# EAGLE board lm709_PCB (EAGLE 9.6.2)
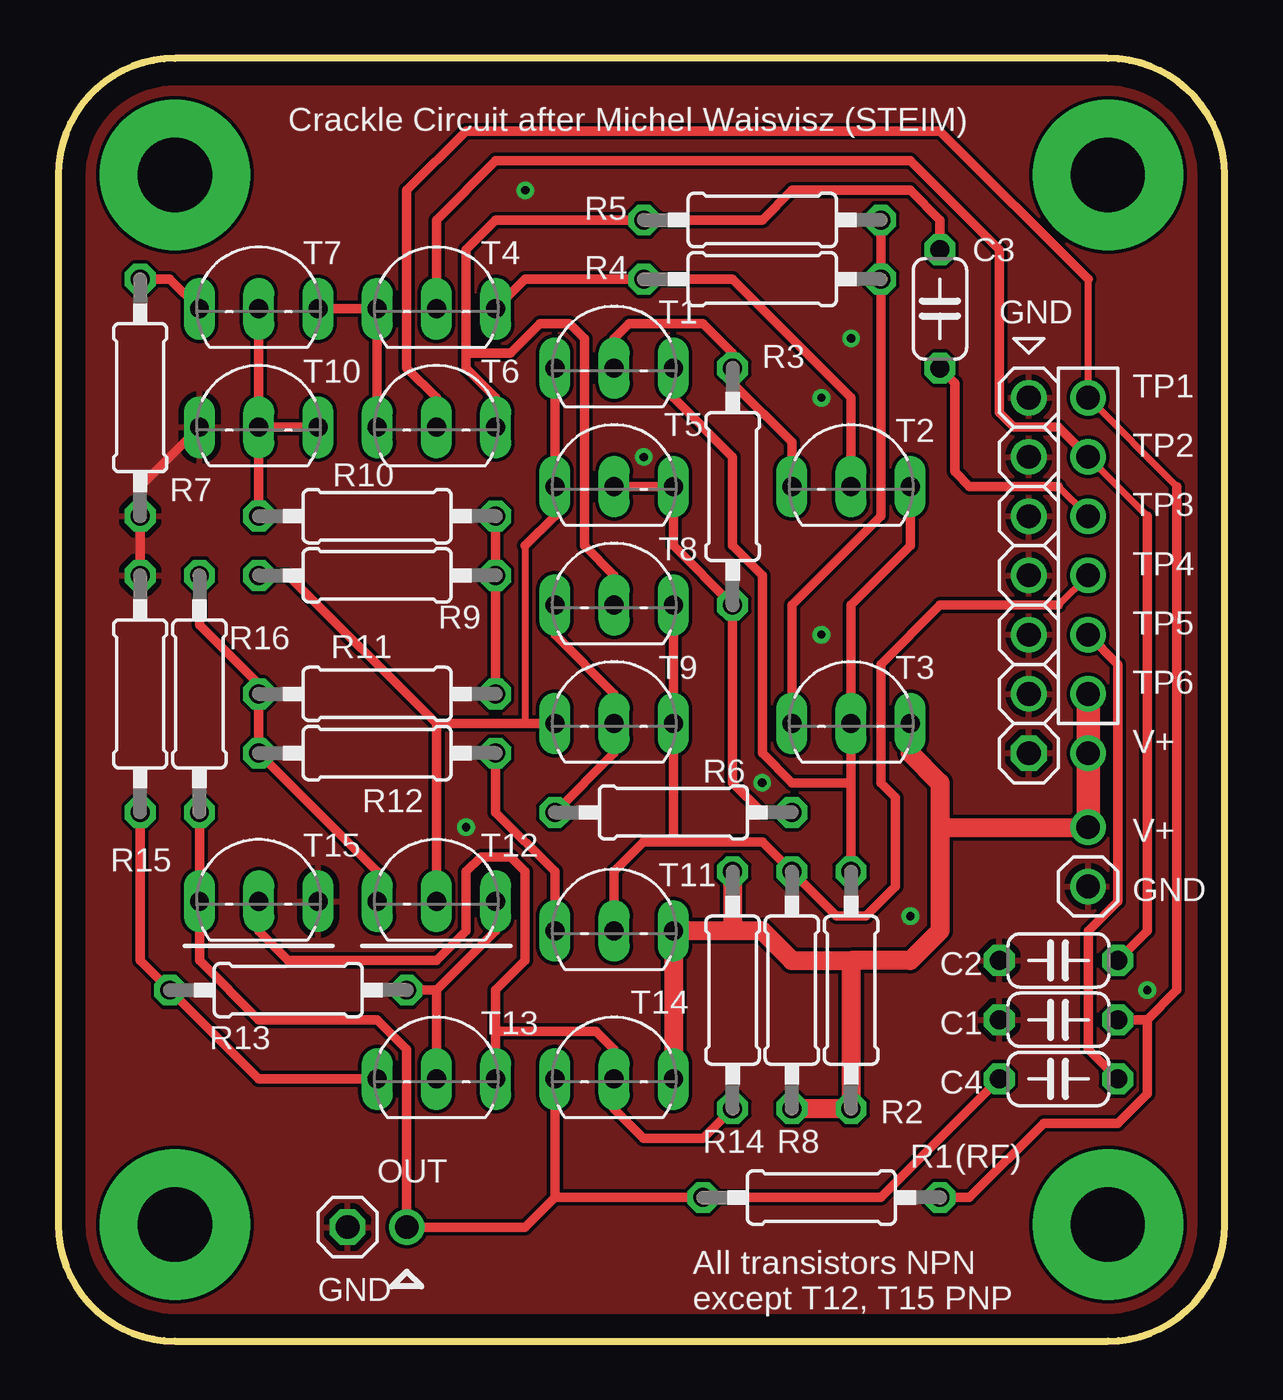
[diagram p0: board, top side]
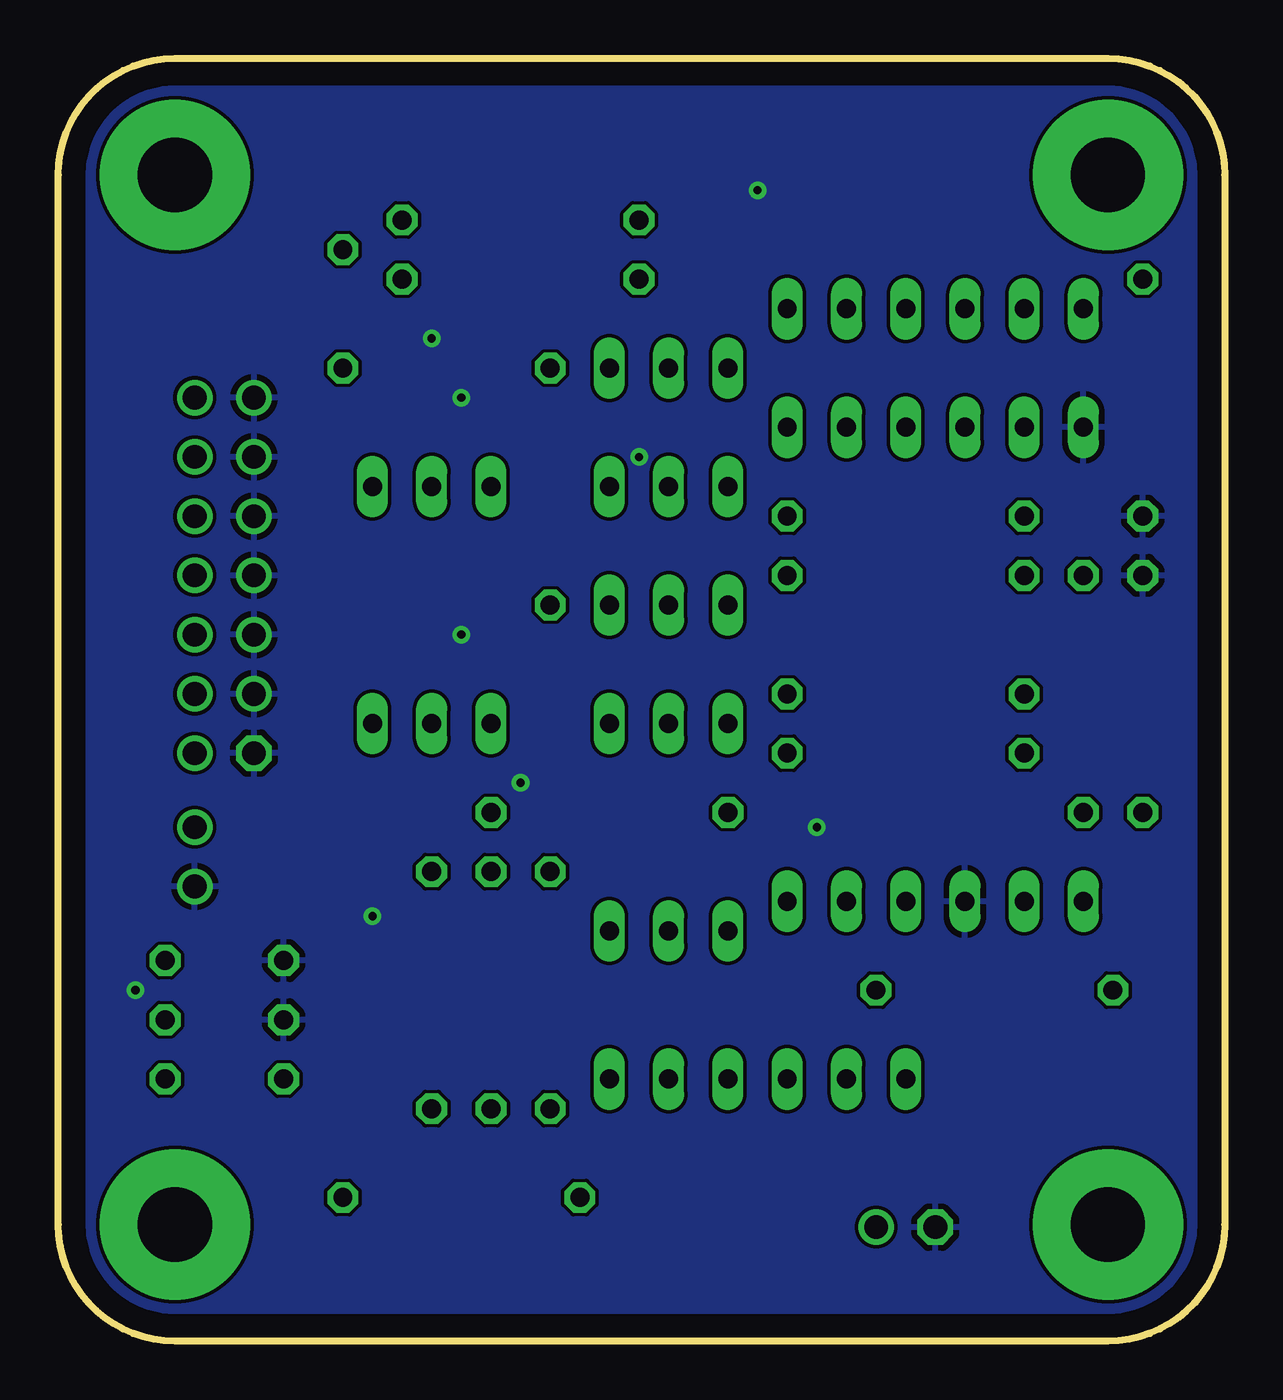
[diagram p1: board, bottom side, seen from below]

Size 50 x 55 mm. Coordinates in mm from the lower left corner, seen from the top.
Outline: 5,55 arc90 0,50 0,5 arc90 5,0 45,0 arc90 50,5 50,50 arc90 45,55 5,55
Copper layers (1*16): Top 0.035mm / dielectric 1.5mm / Bottom 0.035mm
Design rules "default": minimum track width 6mil, minimum drill 0.35mm, track to track 6mil, track to pad 6mil, pad to pad 6mil, via to via 6mil, smd to smd 6mil, copper to edge 40mil, drill to drill 6mil, minimum pad ring 10mil, minimum via ring 8mil, stop-mask expansion 4mil, vias tented up to drill 0mil, thermal gap 10mil

## Footprints (pad centres in the part's own frame; a part is rotated, then mirrored left to right if it is on the bottom)
C050-024X044 = drill 0.813 octagon: 1 -2.54,0; 2 2.54,0
1X01 = drill 1.016 octagon: 1 0,0
1X01' = drill 1.016: 1 0,0
MOUNT_CH32 = drill 3.175 pad 6.452: P$1 0,0
SOL_PAD_ROUND = drill 1.016: 1 0,0
0207/10 = drill 0.813 octagon: 1 -5.08,0; 2 5.08,0
TO92-EBC = drill 0.813 long: B 0,-1.27; C 2.54,-1.27; E -2.54,-1.27

## Placement (x,y rotation side)
C1  2,7nF  [C050-024X044]  42.88,13.78 180 top
C2  10nF  [C050-024X044]  42.88,16.32 180 top
C3  10nF  [C050-024X044]  37.8,44.26 90 top
C4  100nF  [C050-024X044]  42.88,11.24 180 top
GND  [1X01]  41.61,25.21 180 top
JP1  [1X01']  41.61,27.75 0 top
JP2  [1X01]  12.4,4.89 90 top
JP3  [1X01']  41.61,32.83 0 top
JP4  [1X01']  41.61,35.37 0 top
JP5  [1X01']  41.61,37.91 0 top
JP6  [1X01']  41.61,40.45 0 top
JP7  [1X01']  41.61,30.29 0 top
JP8  [1X01']  44.15,19.49 0 top
P1  MOUNT_CH  [MOUNT_CH32]  45,5 0 top
P2  MOUNT_CH  [MOUNT_CH32]  45,50 0 top
P3  MOUNT_CH  [MOUNT_CH32]  5,50 0 top
P4  MOUNT_CH  [MOUNT_CH32]  5,5 0 top
P5  SOL_PIN_ROUND  [SOL_PAD_ROUND]  44.15,40.45 0 top
P6  SOL_PIN_ROUND  [SOL_PAD_ROUND]  44.15,37.91 0 top
P7  SOL_PIN_ROUND  [SOL_PAD_ROUND]  44.15,35.37 0 top
P8  SOL_PIN_ROUND  [SOL_PAD_ROUND]  44.15,32.83 0 top
P9  SOL_PIN_ROUND  [SOL_PAD_ROUND]  44.15,30.29 0 top
P10  SOL_PIN_ROUND  [SOL_PAD_ROUND]  44.15,27.75 0 top
P11  SOL_PIN_ROUND  [SOL_PAD_ROUND]  44.15,25.21 0 top
P12  SOL_PIN_ROUND  [SOL_PAD_ROUND]  14.94,4.89 0 top
P13  SOL_PIN_ROUND  [SOL_PAD_ROUND]  44.15,22.04 0 top
R1  1k  [0207/10]  32.72,6.16 0 top
R2  10k  [0207/10]  33.99,15.05 270 top
R3  3k  [0207/10]  28.91,36.64 90 top
R4  25k  [0207/10]  30.18,45.53 0 top
R5  25k  [0207/10]  30.18,48.07 0 top
R6  3k  [0207/10]  26.37,22.67 180 top
R7  2,4k  [0207/10]  3.51,40.45 90 top
R8  10k  [0207/10]  31.45,15.05 270 top
R9  3,6k  [0207/10]  13.67,32.83 180 top
R10  10k  [0207/10]  13.67,35.37 0 top
R11  10k  [0207/10]  13.67,27.75 180 top
R12  1k  [0207/10]  13.67,25.21 0 top
R13  10k  [0207/10]  9.86,15.05 180 top
R14  20k  [0207/10]  28.91,15.05 90 top
R15  75  [0207/10]  3.51,27.75 90 top
R16  30k  [0207/10]  6.05,27.75 90 top
T1  [TO92-EBC]  23.83,42.99 0 top
T2  [TO92-EBC]  33.99,37.91 0 top
T3  [TO92-EBC]  33.99,27.75 0 top
T4  [TO92-EBC]  16.21,45.53 0 top
T5  [TO92-EBC]  23.83,37.91 0 top
T6  [TO92-EBC]  16.21,40.45 0 top
T7  [TO92-EBC]  8.59,45.53 0 top
T8  [TO92-EBC]  23.83,32.83 0 top
T9  [TO92-EBC]  23.83,27.75 0 top
T10  [TO92-EBC]  8.59,40.45 0 top
T11  [TO92-EBC]  23.83,18.86 0 top
T12  [TO92-EBC]  16.21,20.13 0 top
T13  [TO92-EBC]  16.21,12.51 0 top
T14  [TO92-EBC]  23.83,12.51 0 top
T15  [TO92-EBC]  8.59,20.13 0 top

## Library data of the parts
C1-C4 = rcl; SPICEPREFIX: C
GND JP2 = pinhead
JP1 JP3-JP8 = pinhead01
P1-P13 = sol_pin
R1-R16 = rcl; SPICEPREFIX: R
T1-T15 = transistor-neu-to92

## Nets
+12V: P10.1 P11.1 P13.1 R2.2 R8.2 R14.2 T3.C T11.C T14.C
GND: C1.2 C2.2 GND.1 JP1.1 JP2.1 JP3.1 JP4.1 JP5.1 JP6.1 JP7.1 JP8.1 R7.1 R15.2 T10.E T15.C
N$1: R3.2 T1.B T2.E
N$2: R4.1 T2.B T4.C
N$3: R4.2 R5.2 T3.E
N$4: R2.1 T1.C T2.C T3.B
N$6: R6.2 T8.E T9.B
N$7: C3.2 R5.1 T6.C T8.B
N$8: R3.1 R6.1 T5.B T5.C
N$9: R9.2 T1.E T5.E T9.E T12.B
N$10: R14.1 T13.C T14.B T15.B
N$11: C2.1 P6.1 T4.B
N$12: C1.1 P5.1 R1.2 T6.B
N$13: T4.E T6.E T7.C
N$14: R7.2 T7.E
N$16: R10.1 T7.B T10.B T10.C
N$17: R9.1 R10.2 R11.1
N$18: P8.1 R8.1 T8.C T9.C T11.B
N$19: R13.1 T12.C T13.B
N$20: C4.2 P12.1 R1.1 R16.1 T14.E T15.E
N$21: R11.2 R12.1 R16.2 T12.E
N$22: R12.2 T11.E
N$24: R13.2 R15.1 T13.E
N$56: C3.1 P7.1
N$57: C4.1 P9.1

## Tracks (layer width: path | path; a pad name or v marks a point on that pad's centre or on a via)
+12V
  Top 0.813: T14.C T11.C 28.91,17.59 | 37.8,22.04 P13.1 | 37.8,22.04 37.8,23.94 36.53,25.21 T3.C | 37.8,22.04 37.8,17.59 36.53,16.32 33.99,16.32 | R8.2 R2.2 33.99,16.32 | 28.91,17.59 30.18,17.59 31.45,16.32 33.99,16.32 | R14.2 28.91,17.59
  Top 1.016: P13.1 P11.1 P10.1
GND  (via drill 0.35)
  Top 0.406: R15.2 R7.1 3.51,36.64 T10.E
  other vias: 36.53,18.22 46.69,15.05 32.72,30.29 32.72,40.45 33.99,42.99 20.02,49.34 25.1,37.91 17.48,22.04 30.18,23.94
  pour Top: -0.3,55.69 50.5,55.69 50.5,-1.46 -0.3,-1.46
  pour Bottom: -0.3,55.69 50.5,55.69 50.5,-1.46 -0.3,-1.46
N$1
  Top 0.406: T2.E 31.45,38.55 28.91,41.09 R3.2 28.91,42.36 27.64,43.62 24.46,43.62 23.83,42.99 T1.B
N$2
  Top 0.406: T4.C 20.02,45.53 R4.1 28.91,45.53 33.99,40.45 T2.B
N$3
  Top 0.406: R5.2 R4.2 35.26,35.37 31.45,31.56 T3.E
N$4
  Top 0.406: R2.1 33.99,23.94 | 33.99,23.94 T3.B 33.99,31.56 36.53,34.1 T2.C | T1.C 26.37,40.45 28.91,37.91 28.91,34.1 30.18,32.83 30.18,25.21 31.45,23.94 33.99,23.94
N$6
  Top 0.406: R6.2 23.83,25.21 T9.B 23.83,27.75 21.29,30.29 T8.E
N$7
  Top 0.406: T8.B 23.83,32.83 22.56,34.1 22.56,41.72 | 22.56,41.72 | T6.C 18.75,40.45 17.48,41.72 17.48,42.36 | 17.48,42.36 17.48,46.8 18.75,48.07 R5.1 30.18,48.07 31.45,49.34 36.53,49.34 37.8,48.07 C3.2 | 17.48,42.36 19.38,42.36 20.65,43.62 21.92,43.62 22.56,42.99 22.56,41.72
N$8
  Top 0.406: T5.B T5.C 26.37,34.1 R3.1 28.91,23.94 30.18,22.67 R6.1
N$9
  Top 0.305: 20.02,34.1 20.02,26.48
  Top 0.406: R9.2 9.86,32.83 16.21,26.48 | 20.02,34.1 21.29,35.37 T5.E T1.E | T9.E 20.02,26.48 16.21,26.48 | T12.B 16.21,26.48
N$10
  Top 0.406: R14.1 27.64,8.7 25.1,8.7 23.83,9.97 T14.B 23.83,12.51 23.05,13.29 18.75,13.29 T13.C 18.75,15.05 20.02,16.32 20.02,20.13 19.38,20.76 18.11,20.76 17.48,20.13 17.48,17.59 16.21,16.32 9.86,16.32 8.59,17.59 T15.B
N$11
  Top 0.305: P6.1 46.69,35.37
  Top 0.406: 46.69,35.37 46.69,17.59 C2.1 | T4.B 16.21,48.07 18.75,50.61 36.53,50.61 40.34,46.8 40.34,39.82 40.98,39.18 42.88,39.18 P6.1
N$12
  Top 0.305: 47.96,36.64 P5.1 44.15,45.53
  Top 0.406: T6.B 16.21,40.45 14.94,41.72 14.94,49.34 17.48,51.88 37.8,51.88 44.15,45.53 | 47.96,36.64 47.96,15.05 46.69,13.78 | C1.1 46.69,13.78 | 46.69,13.78 46.69,10.61 45.42,9.34 42.24,9.34 39.07,6.16 R1.2
N$13
  Top 0.406: T6.E T4.E T7.C
N$14
  Top 0.406: T7.E 4.78,45.53 R7.2
N$16
  Top 0.406: T10.B T7.B | R10.1 T10.B | T10.C T10.B
N$17
  Top 0.406: R9.1 R11.1 R10.2
N$18
  Top 0.305: 42.88,31.56 P8.1
  Top 0.406: T11.B 23.83,20.13 25.1,21.4 26.37,21.4 | 26.37,21.4 T9.C T8.C | 26.37,21.4 30.18,21.4 R8.1 33.35,18.22 34.62,18.22 35.89,19.49 35.89,23.3 35.26,23.94 35.26,29.02 37.8,31.56 42.88,31.56
N$19
  Top 0.406: T13.B 16.21,15.05 | T12.C 18.75,17.59 16.21,15.05 | R13.1 16.21,15.05
N$20
  Top 0.406: R16.1 T15.E 6.05,16.32 8.59,13.78 13.67,13.78 14.94,12.51 P12.1 20.02,4.89 21.29,6.16 | C4.2 35.26,6.16 R1.1 21.29,6.16 | T14.E 21.29,6.16
N$21
  Top 0.406: R12.1 R11.2 | R12.1 13.67,20.13 T12.E | R12.1 8.59,28.17 6.05,30.71 R16.2
N$22
  Top 0.406: T11.E 21.29,20.13 18.75,22.67 R12.2
N$24
  Top 0.406: R15.1 3.51,16.32 R13.2 8.59,11.24 T13.E
N$56
  Top 0.305: P7.1 42.88,36.64
  Top 0.406: C3.1 38.44,41.09 38.44,37.28 39.07,36.64 42.88,36.64
N$57
  Top 0.406: C4.1 44.15,12.51 44.15,17.59 45.42,18.86 45.42,29.02 P9.1

## Text on the board
tNames: Crackle Circuit after Michel Waisvisz (STEIM) | TP1 | TP2 | TP3 | TP4 | TP5 | TP6 | V+ | V+ | GND | (RF) | OUT | GND | All transistors NPN / except T12, T15 PNP